# Altium PCB Copy of Controller.PcbDoc (part 1 of 2)
Units mm, origin at the board's own origin, x right, y up, seen from the top; angles counter-clockwise.
Board outline 100 x 80 mm, 2 copper layers (Top Layer, Bottom Layer); 164 components, 143 nets, 702 pads, 520 vias.
Unrouted connection lines stored in the file: 175.
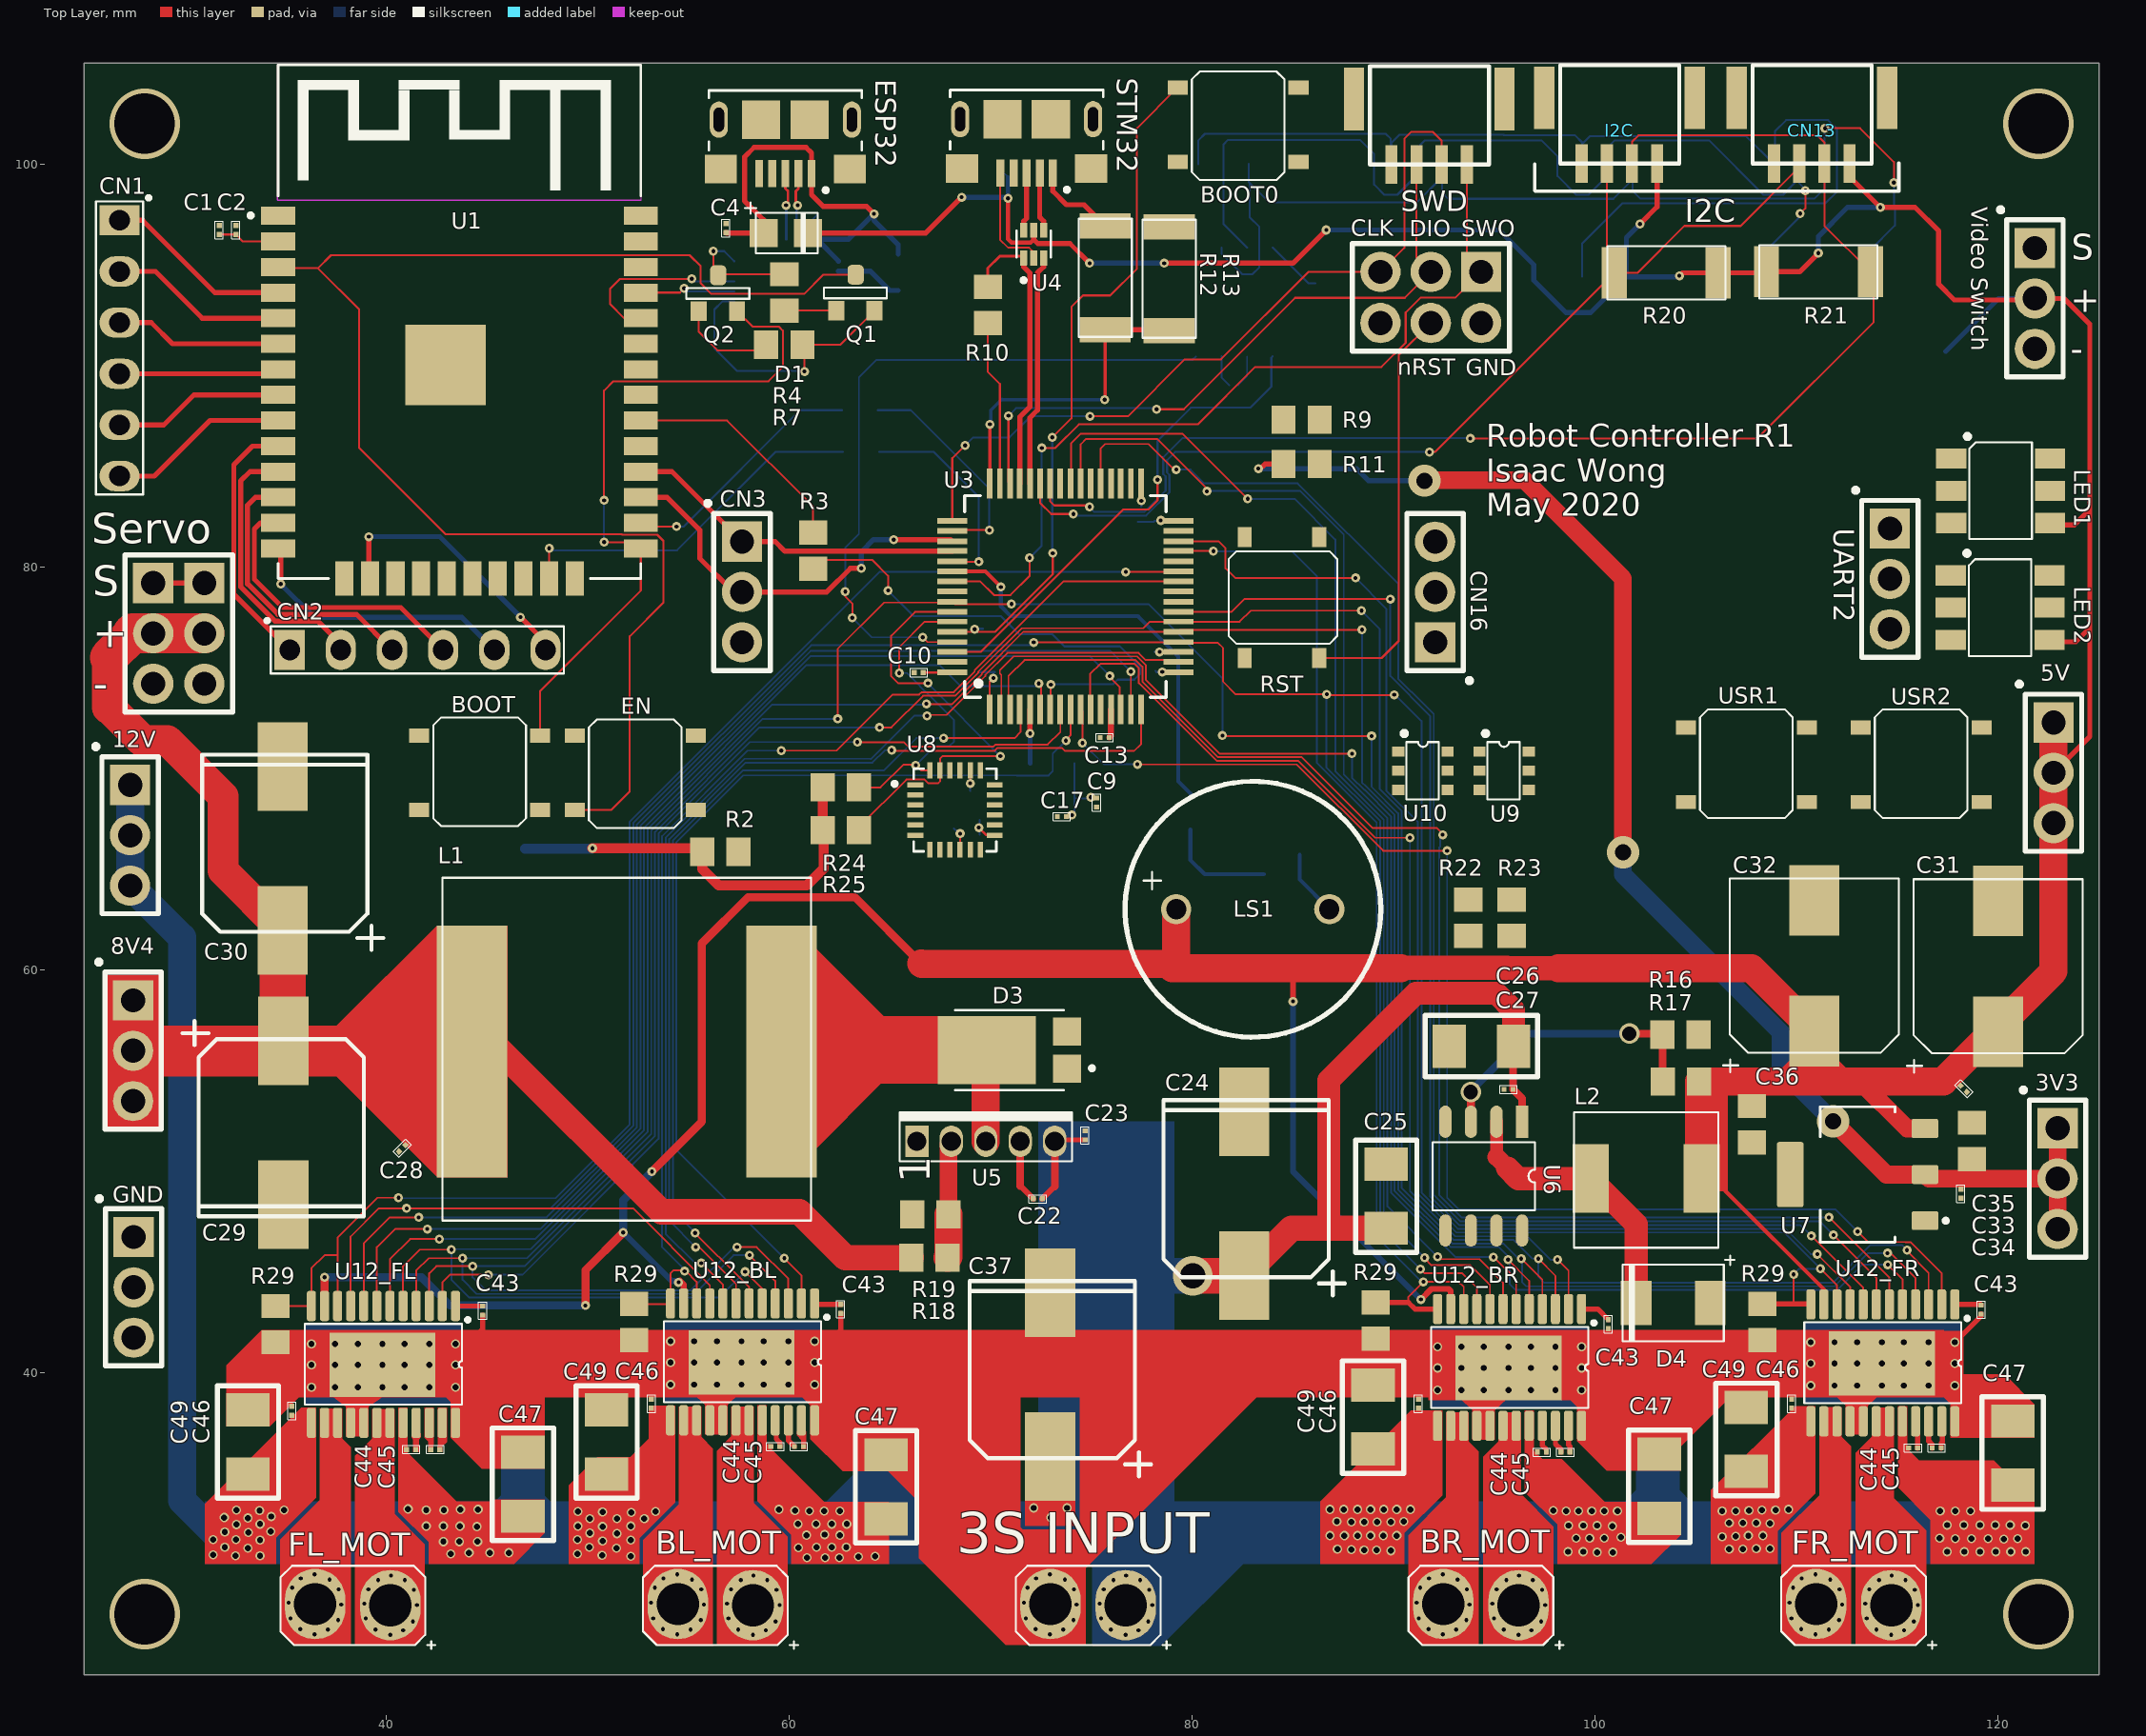
[diagram p0: Top Layer view]
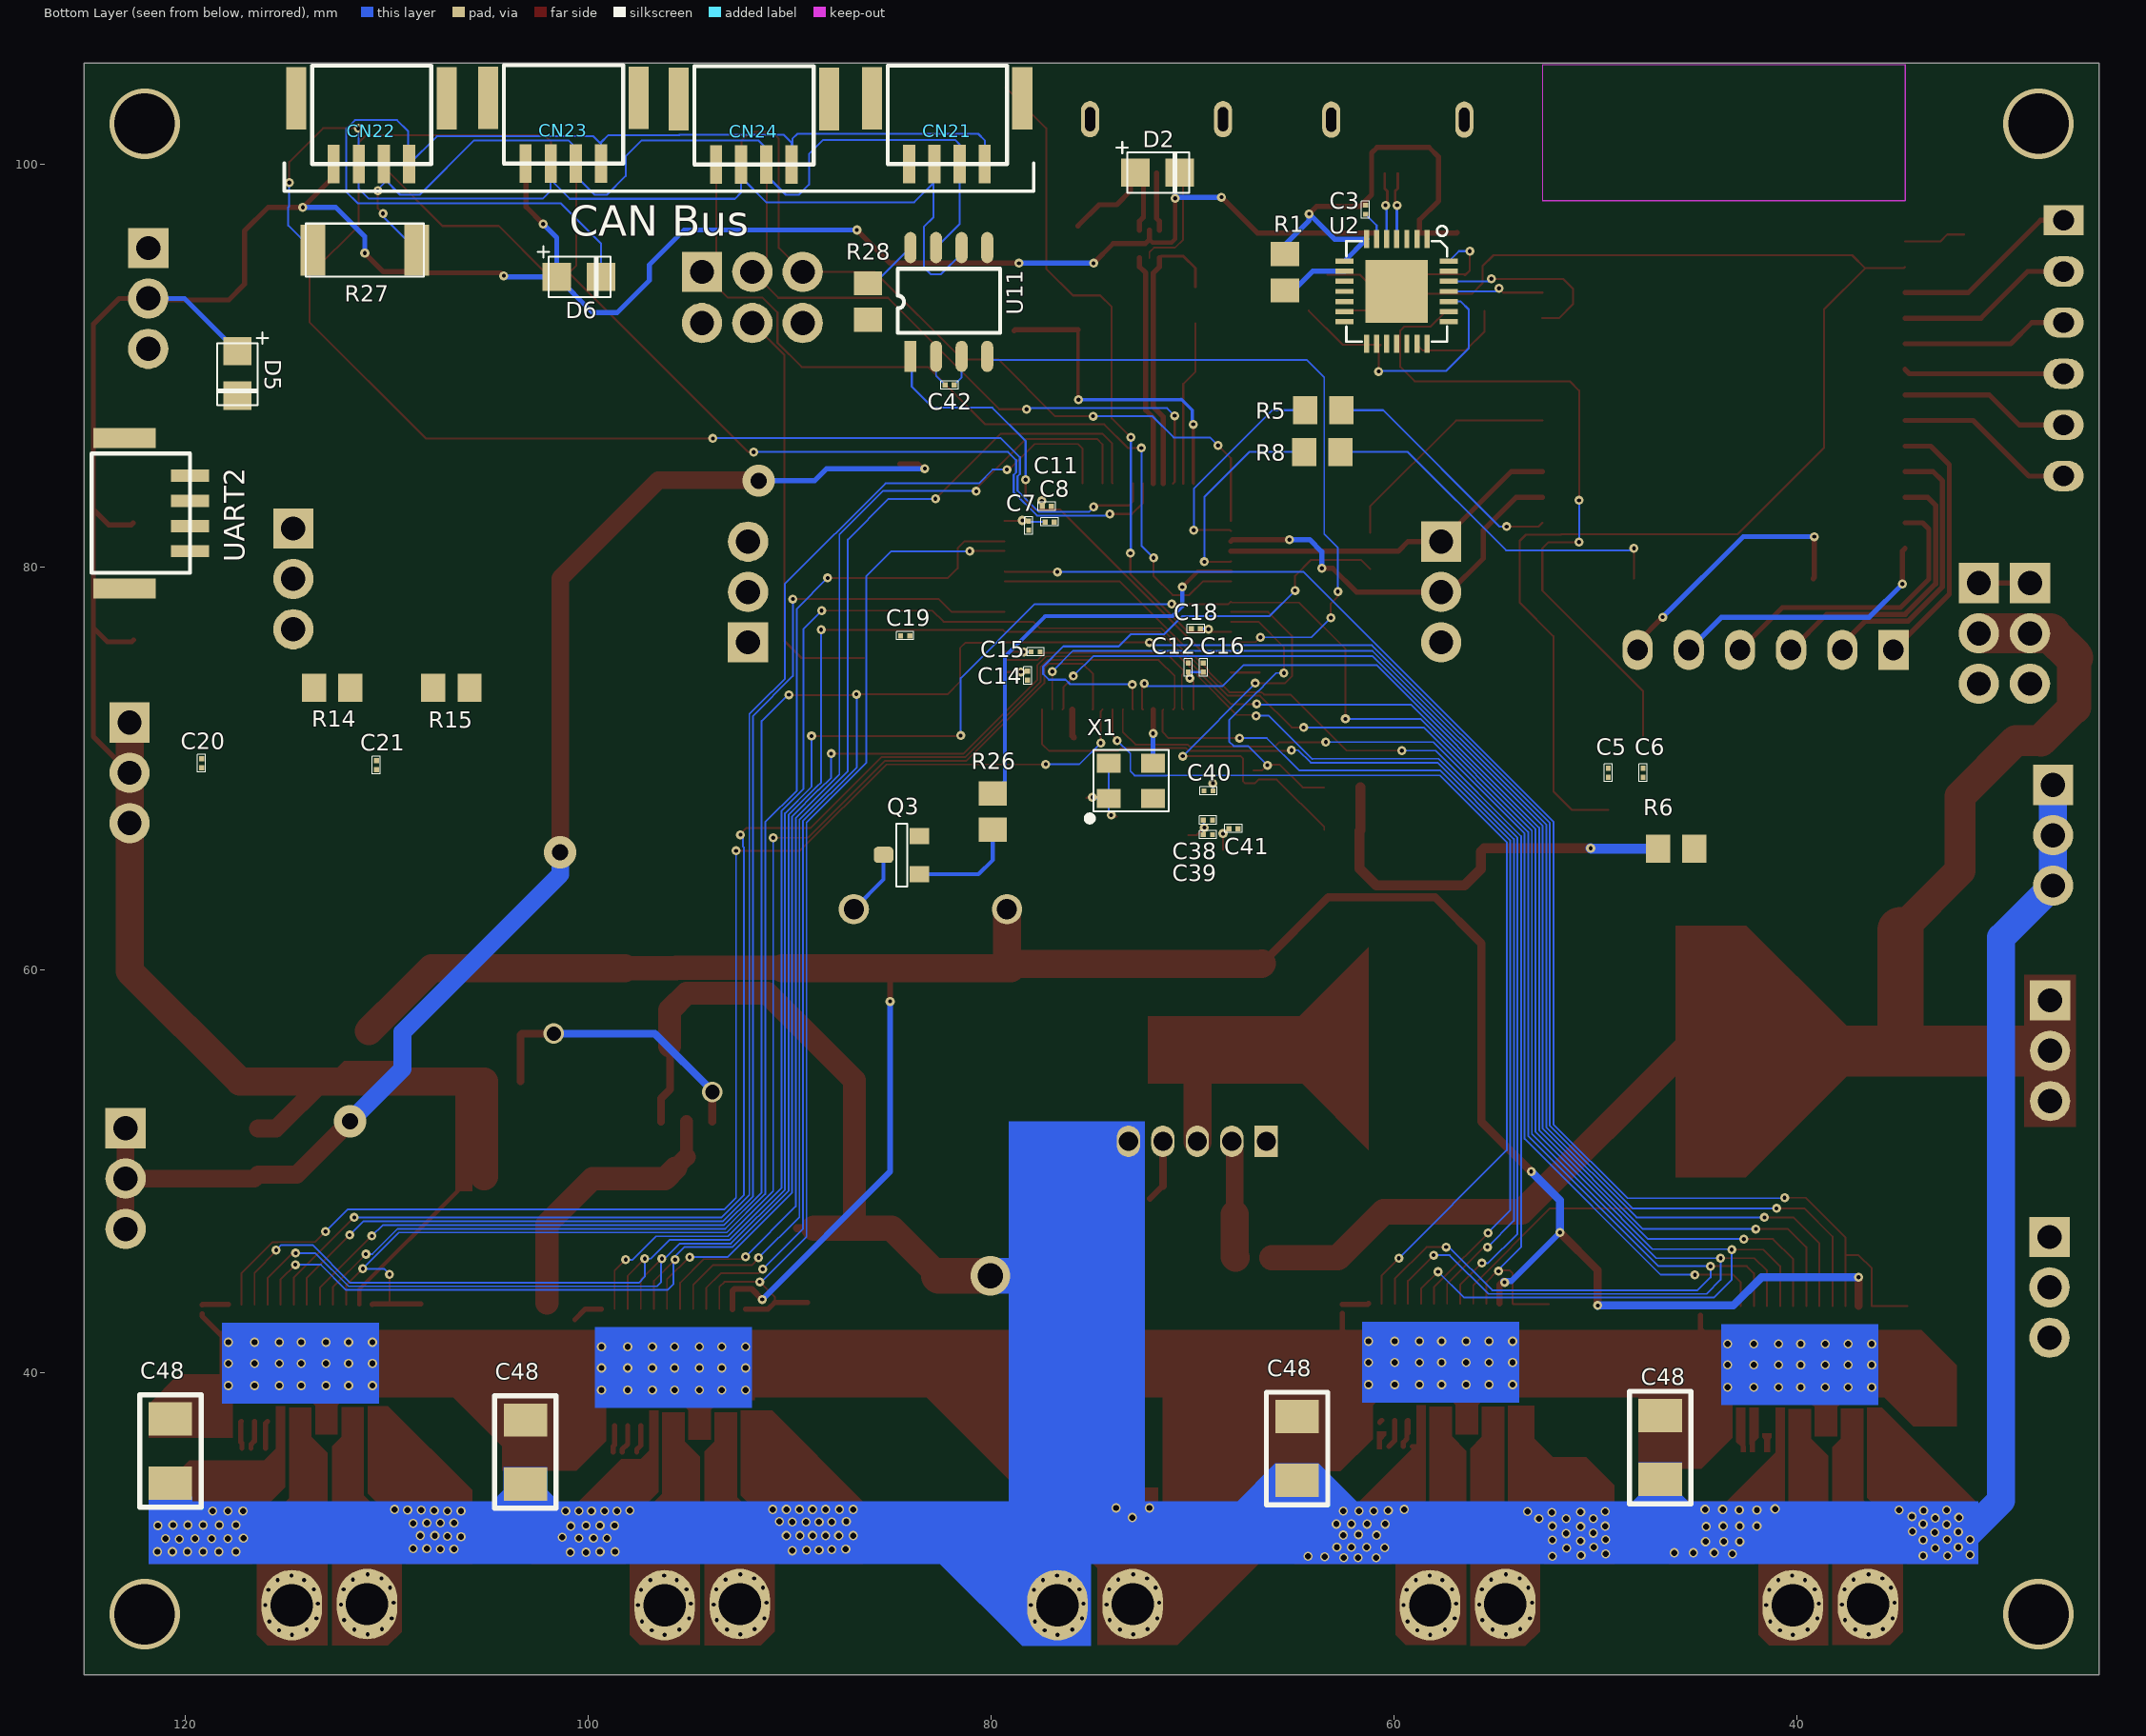
[diagram p1: Bottom Layer view, seen from below]

## Layer stack, top to bottom
Top Solder: solder mask 0.0102, Solder Resist, Dk 3.5
Top Layer: signal copper 0.0356
Dielectric 1: dielectric 0.32, FR-4, Dk 4.8
Bottom Layer: signal copper 0.0356
Bottom Solder: solder mask 0.0102, Solder Resist, Dk 3.5

## Board outline
25,25 125,25 125,105 25,105

## Design rules (kind name [scope] priority, off if disabled: settings)
BoardOutlineClearance [All] p1: gap=0.2 ignorepadtopadclearanceinfootprint=FALSE except(0.4: Arc-SplitBarrior Arc-SplitContinuation Track-SplitBarrior Track-SplitContinuation SMDPad-SplitBarrior SMDPad-SplitContinuation THPad-SplitBarrior THPad-SplitContinuation Via-SplitBarrior Via-SplitContinuation Fill-SplitBarrior Fill-SplitContinuation Poly-SplitBarrior Poly-SplitContinuation Region-SplitBarrior Region-SplitContinuation Text-SplitBarrior Text-SplitContinuation)
Clearance "Clearance Bottom Layer" [OnLayer('Bottom Layer')] p1: gap=0.2 ignorepadtopadclearanceinfootprint=TRUE except(0.089: Arc-Arc Arc-Track Arc-SMDPad Track-Track Track-SMDPad SMDPad-SMDPad; 0.127: Arc-Via Track-Via SMDPad-Via THPad-Via Via-Via; 0.254: Arc-Text Track-Text SMDPad-Text THPad-Text Via-Text Text-Text)
Clearance "Clearance Top Layer" [OnLayer('Top Layer')] p2: gap=0.2 ignorepadtopadclearanceinfootprint=TRUE except(0.089: Arc-Arc Arc-Track Arc-SMDPad Track-Track Track-SMDPad SMDPad-SMDPad; 0.127: Arc-Via Track-Via SMDPad-Via THPad-Via Via-Via; 0.203: Text-Hole; 0.254: Arc-Text Track-Text SMDPad-Text THPad-Text Via-Text Fill-Text Poly-Text Region-Text Text-Text)
Clearance [All] p3: gap=0.2 ignorepadtopadclearanceinfootprint=FALSE except(0.089: Arc-Arc Arc-Track Arc-SMDPad Track-Track Track-SMDPad SMDPad-SMDPad; 0.127: Arc-Via Track-Via SMDPad-Via THPad-Via Via-Via; 0.254: Arc-Text Track-Text SMDPad-Text THPad-Text Via-Text Fill-Text Poly-Text Region-Text Text-Text)
DiffPairsRouting [All] p1: maxlimit=0.254 minlimit=0.254 mostfreqgap=0.254 toplayer_minwidth=0.127 toplayer_maxwidth=0.381 toplayer_prefwidth=0.381 bottomlayer_minwidth=0.127 bottomlayer_maxwidth=0.381 bottomlayer_prefwidth=0.381 maxuncoupledlength=12.7
HoleSize [All] p1: absolutevalues=TRUE maxlimit=6.3 minlimit=0.2 maxpercent=80.000 minpercent=20.000
MinimumAnnularRing [All] p1: minimumring=0.076
MinimumSolderMaskSliver [All] p1: minsoldermaskwidth=0.1
PolygonConnect PolygonConnect_1 [All] p1: thpad.connectstyle=Relief thpad.reliefconductorwidth=0.508 thpad.reliefentries=4 thpad.polygonreliefangle="90 Angle" thpad.airgapwidth=0.254 smdpad.connectstyle=Relief smdpad.reliefconductorwidth=0.508 smdpad.reliefentries=4 smdpad.polygonreliefangle="90 Angle" smdpad.airgapwidth=0.254 via.connectstyle=Direct via.reliefconductorwidth=0.508 via.reliefentries=4 via.polygonreliefangle="90 Angle" via.airgapwidth=0.254
RoutingCorners [All] p1: cornerstyle=Round minsetback=2.54 maxsetback=2.54
RoutingVias [All] p1: holewidth=0.5 width=1 viastyle="Through Hole" minholewidth=0.2 minwidth=0.45 maxholewidth=1 maxwidth=2
SilkToSilkClearance [All] p1: silktosilkclearance=0.1
SilkToSolderMaskClearance [IsPad] p1: minsilkscreentomaskgap=0.1 clearancetoexposedcopper=TRUE
SolderMaskExpansion [All] p1: expansion=0.102
Width [All] p1: maxlimit=2.54 minlimit=0.089 preferedwidth=0.381
24 further rules are at their usual default settings.

## Classes and differential pairs
channel class DRV8843: BL BR FL FR
component class U_Power: "3S INPUT" 3V3 5V 8V4 12V C22 C23 C24 C25 C26 C27 C28 C29 C30 C31 C32 C33 C34 C35 C36 C37 D3 D4 GND L1 L2 R16 R17 R18 R19 U5 U6 U7
component class U_MCU: BOOT BOOT0 C1 C2 C3 C4 C5 C6 C7 C8 C9 C10 C11 C12 C13 C14 C15 C16 C17 C18 C19 C20 C21 CN1 CN2 CN3 D2 EN ESP32 Q1 Q2 R1 R2 R3 R4 R5 R6 R7 R8 R9 R10 R11 R12 R13 R14 R15 RST STM32 SWD U1 U2 U3 U4 USR1 USR2 X1
component class U_LED: LED1 LED2 U9 U10
component class U_IMU: C38 C39 C40 C41 U8
component class U_Drive: BL_MOT BR_MOT FL_MOT FR_MOT
component class U_CAN: C42 CN21 CN22 CN23 CN24 D6 R27 R28 U11
component class FR: C43 C44 C45 C46 C47 C48 C49 R29 U12_FR
component class FL: C44 C45 C46 C47 C48 R29 U12_FL
component class Controller: CN13 CN16 D5 I2C LS1 Q3 R20 R21 R22 R23 R24 R25 R26 UART2 "Video SWITCH"
component class BR: C43 C44 C45 C46 C47 C48 C49 R29 U12_BR
component class BL: C43 C44 C45 C46 C47 C48 C49 R29 U12_BL
differential pair USB: +USB_P -USB_N
differential pair NO_ESD: +NO_ESD_P -NO_ESD_N
differential pair ESP_USB: +ESP_USB_P -ESP_USB_N

## Components (designator, comment, footprint, x,y, rotation, side; value= is the part's Value field where it differs from the comment)
"3S INPUT" "Power In" Power_Leads 75.5,28.5 r180 top locked (schematic designator CN7)
3V3 "3P-2.5mm" 2.5mm-3P 122.95,52.125 r0 top (schematic designator CN11)
5V "3P-2.5mm" 2.5mm-3P 122.75,72.275 r0 top (schematic designator CN10)
8V4 "3P-2.5mm" 2.5mm-3P 27.425,58.475 r0 top (schematic designator CN9)
12V "3P-2.5mm" 2.5mm-3P 27.275,69.175 r0 top (schematic designator CN12)
BL_MOT "BL_MOT" Power_Leads 57,28.5 r180 top locked (schematic designator CN27)
BOOT "SPST Switch" 4.8x4.8-SMD-SWITCH 41.625,71.625 r0 top (schematic designator SW2)
BOOT0 "SPST Switch" 4.8x4.8-SMD-SWITCH 85.275,100.1 r180 top (schematic designator SW3)
BR_MOT "BR_MOT" Power_Leads 95,28.5 r180 top locked (schematic designator CN28)
C1 "ESP32_P1" 0402 31.7,96.725 r270 top value=1uF
C2 "ESP32_P1" 0402 32.525,96.725 r270 top value=100nF
C3 "P6" 0402 61.4,97.725 r270 bottom value=100nF
C4 "P7" 0402 56.85,96.825 r270 top value=100nF
C5 "Cap" 0402 49.35,69.775 r270 bottom value=100nF
C6 "Cap" 0402 47.625,69.775 r90 bottom value=100nF
C7 "Pin 32" 0402 78.125,82.05 r90 bottom value=100nF
C8 "Pin 33" 0402 77.225,83 r0 bottom value=100nF
C9 "XO" 0402 75.25,68.3 r90 top value=100nF
C10 "" 0402 66.425,74.75 r0 top value=1uF
C11 "" 0402 77.075,82.225 r0 bottom value=1uF
C12 "Pin 1" 0402 70.2,75 r270 bottom value=100nF
C13 "Pin 13" 0402 75.65,71.525 r0 top value=100nF
C14 "Pin 17" 0402 78.175,74.6 r90 bottom value=100nF
C15 "Pin 19" 0402 77.775,75.775 r0 bottom value=100nF
C16 "Pin 64" 0402 69.45,75 r270 bottom value=100nF
C17 "XO" 0402 73.525,67.6 r0 top value=10nF
C18 "Cap" 0402 69.825,76.925 r0 bottom value=100nF
C19 "Cap" 0402 84.25,76.575 r0 bottom value=100nF
C20 "Cap" 0402 119.175,70.25 r90 bottom value=100nF
C21 "Cap" 0402 110.5,70.15 r90 bottom value=100nF
C22 "Cap" 0402 72.325,48.625 r0 top value=1uF
C23 "Cap" 0402 74.675,51.775 r270 top value=1uF
C24 "470uF" 10x12mm-Electrolytic 82.575,49.125 r270 top
C25 "Cap" 1206 89.625,48.75 r270 top value=47uF
C26 "Cap" 1206 94.35,56.2 r0 top value=47uF
C27 "Cap" 0402 95.7,54.05 r0 top value=100nF
C28 "Cap" 0402 40.784,51.134 r45 top value=1uF
C29 "470uF" 10x12mm-Electrolytic 34.875,52.15 r90 top
C30 "470uF" 10x12mm-Electrolytic 34.85,66.275 r270 top
C31 "100uF" "8x10.2 Cap" 120,60.175 r90 top
C32 "100uF" "8x10.2 Cap" 110.875,60.2 r90 top
C33 "Cap" "0805 - duplicate" 118.7,51.5 r270 top value=4.7uF
C34 "Cap" 0402 118.15,48.875 r90 top value=100nF
C35 "Cap" 0402 118.291,54.084 r135 top value=100nF
C36 "Cap" "0805 - duplicate" 107.775,52.325 r90 top value=4.7uF
C37 "470uF" 10x12mm-Electrolytic 72.95,40.143 r270 top
C38 "Cap" 0402 69.225,67.425 r0 bottom value=1uF
C39 "Cap" 0402 69.225,66.7 r0 bottom value=100nF
C40 "Cap" 0402 69.2,68.875 r180 bottom value=2.2nF
C41 "Cap" 0402 67.95,67 r0 bottom value=100nF
C42 "Cap" 0402 82.05,89.025 r180 bottom value=100nF
C43 "Cap" 0402 119.15,43.125 r270 top value=1uF
C43 "Cap" 0402 44.775,43.075 r270 top value=1uF
C43 "Cap" 0402 100.65,42.4 r270 top value=1uF
C43 "Cap" 0402 62.55,43.15 r270 top value=1uF
C44 "Cap" 0402 115.775,36.25 r180 top value=1uF
C44 "Cap" 0402 41.225,36.175 r180 top value=1uF
C44 "Cap" 0402 97.35,36.05 r180 top locked value=1uF
C44 "Cap" 0402 59.3,36.325 r180 top value=1uF
C45 "Cap" 0402 116.95,36.25 r180 top value=47nF
C45 "Cap" 0402 42.425,36.175 r180 top value=47nF
C45 "Cap" 0402 98.525,36.05 r180 top locked value=47nF
C45 "Cap" 0402 60.475,36.325 r180 top value=47nF
C46 "Cap" 0402 109.75,38.45 r270 top value=100nF
C46 "Cap" 0402 35.3,38.1 r270 top value=100nF
C46 "Cap" 0402 91.225,38.45 r270 top value=100nF
C46 "Cap" 0402 53.15,38.45 r270 top value=100nF
C47 "Cap" 1206 120.725,36 r270 top value=47uF
C47 "Cap" 1206 46.775,34.45 r270 top locked value=47uF
C47 "Cap" 1206 103.175,34.35 r270 top value=47uF
C47 "Cap" 1206 64.8,34.325 r270 top locked value=47uF
C48 "Cap" 1206 120.725,36.1 r270 bottom value=47uF
C48 "Cap" 1206 46.775,36.275 r270 bottom value=47uF
C48 "Cap" 1206 103.1,36.05 r270 bottom value=47uF
C48 "Cap" 1206 64.8,36.225 r270 bottom locked value=47uF
C49 "Cap" 1206 107.5,36.675 r270 top value=47uF
C49 "Cap" 1206 33.125,36.55 r270 top value=47uF
C49 "Cap" 1206 88.975,37.788 r270 top value=47uF
C49 "Cap" 1206 50.925,36.55 r270 top value=47uF
CN1 "6P-2.5mm" 6-Pin-Header 26.75,97.205 r0 top
CN2 "6P-2.5mm" 6-Pin-Header 35.195,75.875 r90 top
CN3 "3P-2.5mm" 2.5mm-3P 57.65,81.25 r0 top
CN13 "JST_GH-4P" JST_GH-4P 108.875,100.025 r90 top
CN16 "3P-2.5mm" 2.5mm-3P 92.05,76.25 r180 top
CN21 "JST_GH-4P" JST_GH-4P 84.05,100 r90 bottom
CN22 "JST_GH-4P" JST_GH-4P 112.625,100 r90 bottom
CN23 "JST_GH-4P" JST_GH-4P 103.1,100.025 r90 bottom
CN24 "JST_GH-4P" JST_GH-4P 93.646,99.974 r90 bottom
D1 "SS12F" SMAF_DIODE 59.825,96.575 r0 top
D2 "SS12F" SMAF_DIODE 71.725,99.575 r180 bottom
D3 "Diode" PowerDi5 70.919,56.005 r90 top
D4 "SS24" DO-214AA 103.875,43.45 r0 top
D5 "SS12F" SMAF_DIODE 117.4,89.6 r270 bottom
D6 "SS12F" SMAF_DIODE 100.45,94.4 r180 bottom
EN "SPST Switch" 4.8x4.8-SMD-SWITCH 55.35,67.925 r180 top (schematic designator SW1)
ESP32 "10118193-0001LF" FCI_10118193-0001LF 59.8,102.2 r180 top locked (schematic designator J1)
FL_MOT "FL_MOT" Power_Leads 39,28.5 r180 top locked (schematic designator CN25)
FR_MOT "FR_MOT" Power_Leads 113.5,28.5 r180 top locked (schematic designator CN26)
GND "3P-2.5mm" 2.5mm-3P 27.45,46.725 r0 top (schematic designator CN8)
I2C "JST_GH-4P" JST_GH-4P 99.325,100.025 r90 top (schematic designator CN17)
L1 "47uH 8A" 18x16-9-Inductor 51.925,55.925 r180 top locked
L2 "22uH" 71x66-Inductor 102.525,49.625 r0 top
LED1 "APA102C" 5x5_WS2812 117.675,85.375 r0 top
LED2 "APA102C" 5x5_WS2812 117.65,79.575 r0 top
LS1 "Buzzer" 12-dia-buzzer 79.2,63 r0 top
Q1 "S8050" SOT23-FET 62.325,92.725 r90 top
Q2 "S8050" SOT23-FET 55.5,92.7 r90 top
Q3 "S8050" SOT23-FET 83.547,64.735 r0 bottom
R1 "10k" "0805 - duplicate" 65.4,94.625 r270 bottom
R2 "10k" "0805 - duplicate" 56.575,65.85 r0 top
R3 "0R" "0805 - duplicate" 61.175,80.8 r270 top
R4 "10k" "0805 - duplicate" 59.75,93.625 r270 top
R5 "1k" "0805 - duplicate" 63.5,87.775 r0 bottom
R6 "10k" "0805 - duplicate" 45.975,66 r180 bottom
R7 "10k" "0805 - duplicate" 59.75,91.025 r180 top
R8 "1k" "0805 - duplicate" 63.55,85.7 r0 bottom
R9 "10k" "0805 - duplicate" 85.425,87.3 r0 top
R10 "1.5k" "0805 - duplicate" 69.85,93 r90 top
R11 "10k" "0805 - duplicate" 85.425,85.1 r0 top
R12 "10k" 2010_SMD_Resistor 75.675,94.35 r90 top
R13 "15k" 2010_SMD_Resistor 78.85,94.3 r270 top
R14 "10k" "0805 - duplicate" 112.7,74 r0 bottom
R15 "10k" "0805 - duplicate" 106.775,74 r180 bottom
R16 "3.3k" "0805 - duplicate" 104.225,56.775 r0 top
R17 "10k" "0805 - duplicate" 104.25,54.45 r0 top
R18 "10k" "0805 - duplicate" 66.95,45.7 r180 top
R19 "1.74k" "0805 - duplicate" 67,47.85 r0 top
R20 "2k" 2010_SMD_Resistor 103.525,94.6 r0 top
R21 "2k" 2010_SMD_Resistor 111.079,94.65 r180 top
R22 "20k" "0805 - duplicate" 93.7,62.575 r270 top
R23 "4k" "0805 - duplicate" 95.85,62.575 r270 top
R24 "2k" "0805 - duplicate" 62.55,69.05 r180 top
R25 "2k" "0805 - duplicate" 62.55,66.925 r180 top
R26 "1k" "0805 - duplicate" 79.9,67.85 r90 bottom
R27 "120" 2010_SMD_Resistor 111.075,95.725 r180 bottom
R28 "100" "0805 - duplicate" 86.1,93.175 r90 bottom
R29 "150R" "0805 - duplicate" 108.3,42.5 r90 top
R29 "150R" "0805 - duplicate" 34.5,42.4 r90 top
R29 "150R" "0805 - duplicate" 89.1,42.575 r90 top
R29 "150R" "0805 - duplicate" 52.3,42.5 r90 top
RST "SPST Switch" 4.8x4.8-SMD-SWITCH 86.3,81.475 r270 top (schematic designator SW4)
STM32 "10118193-0001LF" FCI_10118193-0001LF 71.775,102.225 r180 top locked (schematic designator J2)
SWD "JST_GH-4P" JST_GH-4P 89.879,99.974 r90 top (schematic designator CN4)
U1 "ESP-WROOM-32" ESP-WROOM-32 43.625,89.17 r0 top
U2 "CP2102-GMR" QFN28G_0.5-5X5MM 59.85,93.675 r270 bottom locked
U3 "STM32F373RCTx" LQFP64 73.7,78.525 r90 top locked
U4 "USBLC6-2P6" SOT50P160X60-6N 72.125,96.025 r90 top locked
U5 "XL4016" TO220-5L 66.33,51.475 r90 top
U6 "XL1509-ADJ" SOP8-MT3420 96.37,52.45 r270 top
U7 "AMS1117-3.3" SOT229P700X180-4N 113.025,49.825 r90 top
U8 "MPU-6050" QFN50P400X400X95-24N 68.225,67.925 r0 top locked
U9 "PI4ULS5V201" SOT23-PI4ULS5V201 94.25,70.825 r0 top
U10 "PI4ULS5V201" SOT23-PI4ULS5V201 90.225,70.825 r0 top
U11 "SN65HVD230" SOIC8-TI_CAN 83.99,90.45 r90 bottom locked
U12_BL "DRV8873S" HTSSOP24 61.25,43.425 r270 top locked (schematic designator U12)
U12_BR "DRV8873S" HTSSOP24 99.325,43.15 r270 top locked (schematic designator U12)
U12_FL "DRV8873S" HTSSOP24 43.425,43.3 r270 top locked (schematic designator U12)
U12_FR "DRV8873S" HTSSOP24 117.85,43.375 r270 top locked (schematic designator U12)
UART2 "3P-2.5mm" 2.5mm-3P 114.625,81.9 r0 top (schematic designator CN20)
UART2 "JST_GH-4P" JST_GH-4P 119.75,80.775 r0 bottom (schematic designator CN19)
USR1 "USR_BTN1" 4.8x4.8-SMD-SWITCH 104.5,72.025 r0 top (schematic designator SW6)
USR2 "USR_BTN2" 4.8x4.8-SMD-SWITCH 113.175,72.025 r0 top (schematic designator SW5)
"Video Switch" "3P-2.5mm" 2.5mm-3P 121.825,95.825 r0 top locked (schematic designator CN18)
X1 "8MHz 3225 SMD Oscillator" "3.2x2.5 SMD" 74.15,70.25 r180 bottom

## Footprints (in the part's own frame and the unit in brackets; to place one, negate y for a bottom-side part, rotate by r counter-clockwise, add the part's x,y. Pads: shape width x height; smd on the part's side, far side on the other; paste and mask are expansions set on the pad)
2.5mm-3P [mm]
  rect 2x2 hole 1.2: 1(0,0)
  round 2 hole 1.2: 2(0,-2.5) 3(0,-5)
  silkscreen extent -1.8,-6.4 1.4,2
"3.2x2.5 SMD" [mm]
  rect 1.2x0.95 smd: 1(0,-1.75) 2(2.2,-1.75) 3(2.2,0) 4(0,0)
  silkscreen extent -1.11,-2.91 2.97,0.66
4.8x4.8-SMD-SWITCH [mm]
  rect 1x0.7 smd: 1(0,0) 2(6,0) 3(0,-3.7) 4(6,-3.7)
  silkscreen extent 0.7,-4.5 5.3,0.9
5x5_WS2812 [mm]
  rect 1.5x1 smd: 1(0,0) 2(0,-1.6) 3(0,-3.2) 4(4.9,-3.2) 5(4.9,-1.6) 6(4.9,0)
  silkscreen extent 0.7,-4 4,1.2
6-Pin-Header [mm]
  rect 2x1.5 hole 1.02: 1(0,0)
  oval 2x1.5 hole 1.02: 2(0,-2.54) 3(0,-5.08) 4(0,-7.62) 5(0,-10.16) 6(0,-12.7)
  silkscreen extent -1.17,-13.61 1.5,1.17
"8x10.2 Cap" [mm]
  rect 3.5x2.5 smd: 1(-3.25,0) 2(3.25,0)
  silkscreen extent -5.28,-4.19 4.32,4.52
10x12mm-Electrolytic [mm]
  rect 4.4x2.5 smd: 1(4.318,0) 2(-3.81,0)
  silkscreen extent -4.4,-4 5.3,5
12-dia-buzzer [mm]
  round 1.5 hole 1: A(0,0) K(7.6,0)
  silkscreen extent -2.54,-6.35 10.16,6.35
18x16-9-Inductor [mm]
  rect 3.5x12.5 smd: 1(-7.675,0) 2(7.675,0)
  silkscreen extent -9.14,-8.64 9.14,8.38
71x66-Inductor [mm]
  rect 1.8x3.4 smd: 1(-2.75,0) 2(2.75,0)
  silkscreen extent -3.58,-3.43 3.58,3.3
0402 [mm]
  rect 0.25x0.25 smd mask+0.05: 1(-0.225,0) 2(0.225,0)
  silkscreen extent -0.43,-0.2 0.43,0.2
"0805 - duplicate" [mm] "Chip Resistor, Body 2.0x1.2mm, IPC Medium Density"
  rect 1.2x1.4 smd: 1(-0.9,0) 2(0.9,0)
  body extent -1.07,-0.7 1.07,0.7, height 0.7
1206 [mil]
  rect 65x85 smd: 1(-62.5,0) 2(62.5,0)
  silkscreen extent -110,-60 110,60
2010_SMD_Resistor [mm]
  rect 1.245x2.54 smd: 1(-2.578,0) 2(2.579,0)
  silkscreen extent -2.93,-1.32 2.93,1.32
DO-214AA [mm]
  rect 1.52x2.18 smd: A(1.84,0) K(-1.839,0)
  silkscreen extent -2.51,-1.91 3.05,2.36
ESP-WROOM-32 [mm]
  rect 1.7x0.9 smd: 1(-9,8.255) 2(-9,6.985) 3(-9,5.715) 4(-9,4.445) 5(-9,3.175) 6(-9,1.905) 7(-9,0.635) 8(-9,-0.635) 9(-9,-1.905) 10(-9,-3.175) 11(-9,-4.445) 12(-9,-5.715) 13(-9,-6.985) 14(-9,-8.255) 25(9,-8.255) 26(9,-6.985) 27(9,-5.715) 28(9,-4.445) 29(9,-3.175) 30(9,-1.905) 31(9,-0.635) 32(9,0.635) 33(9,1.905) 34(9,3.175) 35(9,4.445) 36(9,5.715) 37(9,6.985) 38(9,8.255)
  rect 4x4 smd: 1(-0.7,0.845)
  rect 0.9x1.7 smd: 15(-5.715,-9.755) 16(-4.445,-9.755) 17(-3.175,-9.755) 18(-1.905,-9.755) 19(-0.635,-9.755) 20(0.635,-9.755) 21(1.905,-9.755) 22(3.175,-9.755) 23(4.445,-9.755) 24(5.715,-9.755)
  Keep-Out Layer region: -9.024,15.75 9,15.75 9,9.024 -9.024,9.024
  Keep-Out Layer region: -9.012,15.75 9,15.75 9,9.012 -9.012,9.012
  Keep-Out Layer region: -9.026,15.75 9,15.75 9,9.026 -9.026,9.026
  Keep-Out Layer region: -9.024,15.75 9,15.75 9,9.024 -9.024,9.024
  Keep-Out Layer region: -9.012,15.75 9,15.75 9,9.012 -9.012,9.012
  Keep-Out Layer region: -9.026,15.75 9,15.75 9,9.026 -9.026,9.026
  Keep-Out Layer region: -9.024,15.75 9,15.75 9,9.024 -9.024,9.024
  Keep-Out Layer region: -9.012,15.75 9,15.75 9,9.012 -9.012,9.012
  Keep-Out Layer region: -9.026,15.75 9,15.75 9,9.026 -9.026,9.026
  silkscreen extent -10.46,-9.75 9,15.75
FCI_10118193-0001LF [mm]
  rect 0.4x1.35 smd: 1(-1.3,2.675) 2(-0.65,2.675) 3(0,2.675) 4(0.65,2.675) 5(1.3,2.675)
  oval 0.9x1.8 hole 0.5 slot 1.2 at 90 deg: S(-3.3,0) S(3.3,0)
  rect 1.6x1.4 smd: S(-3.2,2.45) S(3.2,2.45)
  rect 1.9x1.9 smd: S(-1.2,0) S(1.2,0)
  silkscreen extent -3.8,-1.45 3.8,3.6
HTSSOP24 [mm]
  rrect50% 1.5x0.45 smd mask+0.05: 1(0,0) 2(0,-0.65) 3(0,-1.3) 4(0,-1.95) 5(0,-2.6) 6(0,-3.25) 7(0,-3.9) 8(0,-4.55) 9(0,-5.2) 10(0,-5.85) 11(0,-6.5) 12(0,-7.15) 13(5.8,-7.15) 14(5.8,-6.5) 15(5.8,-5.85) 16(5.8,-5.2) 17(5.8,-4.55) 18(5.8,-3.9) 19(5.8,-3.25) 20(5.8,-2.6) 21(5.8,-1.95) 22(5.8,-1.3) 23(5.8,-0.65) 24(5.8,0)
  rect 3.2x5.26 smd: THERM(2.925,-3.625)
  Top Layer region: 1.325,-6.225 4.525,-6.225 4.525,-7.6 1.325,-7.6
  Top Layer region: 1.325,-6.2
  Top Layer region: 1.325,-1 1.325,0.425 4.525,0.425 4.525,-1
  silkscreen extent 0.63,-7.48 4.9,0.67
JST_GH-4P [mm]
  rect 1.9x0.6 smd: 1(0,-3.75) 2(0,-2.5) 3(0,-1.25) 4(0,0)
  rect 3.1x1 smd: 5(3.251,-5.613) 5(3.251,1.854)
  silkscreen extent 0,-4.85 4.88,1.07
LQFP64 [mil]
  rect 58x11 smd: 1(-221,148) 2(-221,128) 3(-221,108) 4(-221,89) 5(-221,69) 6(-221,49) 7(-221,30) 8(-221,10) 9(-221,-10) 10(-221,-30) 11(-221,-49) 12(-221,-69) 13(-221,-89) 14(-221,-108) 15(-221,-128) 16(-221,-148) 33(221,-148) 34(221,-128) 35(221,-108) 36(221,-89) 37(221,-69) 38(221,-49) 39(221,-30) 40(221,-10) 41(221,10) 42(221,30) 43(221,49) 44(221,69) 45(221,89) 46(221,108) 47(221,128) 48(221,148)
  rect 11x58 smd: 17(-148,-221) 18(-128,-221) 19(-108,-221) 20(-89,-221) 21(-69,-221) 22(-49,-221) 23(-30,-221) 24(-10,-221) 25(10,-221) 26(30,-221) 27(49,-221) 28(69,-221) 29(89,-221) 30(108,-221) 31(128,-221) 32(148,-221) 49(148,221) 50(128,221) 51(108,221) 52(89,221) 53(69,221) 54(49,221) 55(30,221) 56(10,221) 57(-10,221) 58(-30,221) 59(-49,221) 60(-69,221) 61(-89,221) 62(-108,221) 63(-128,221) 64(-148,221)
  silkscreen extent -197,-197 197,197
Power_Leads [mm]
  oval 3x3.5 hole 2.1: A(-1.194,0.051) K(2.54,0)
  silkscreen extent -3.43,-1.91 4.27,2.21
PowerDi5 [mm]
  rect 1.39x1.4 smd: 1(-0.92,-2.856) 2(0.92,-2.856)
  rect 3.36x4.86 smd: 3(0,1.126)
  silkscreen extent -1.99,-4.2 1.99,2.69
QFN28G_0.5-5X5MM [mm]
  rect 0.9x0.254 smd: 1(-2.59,1.5) 2(-2.59,1) 3(-2.59,0.5) 4(-2.59,0) 5(-2.59,-0.5) 6(-2.59,-1) 7(-2.59,-1.5) 15(2.59,-1.5) 16(2.59,-1) 17(2.59,-0.5) 18(2.59,0) 19(2.59,0.5) 20(2.59,1) 21(2.59,1.5)
  rect 0.254x0.9 smd: 8(-1.5,-2.59) 9(-1,-2.59) 10(-0.5,-2.59) 11(0,-2.59) 12(0.5,-2.59) 13(1,-2.59) 14(1.5,-2.59) 22(1.5,2.59) 23(1,2.59) 24(0.5,2.59) 25(0,2.59) 26(-0.5,2.59) 27(-1,2.59) 28(-1.5,2.59)
  rect 3.1x3.1 smd paste-3: 29(0,0)
  silkscreen extent -3.25,-2.5 2.5,2.5
QFN50P400X400X95-24N [mm]
  rect 0.79x0.26 smd mask+0.089: 1(-1.97,1.25) 2(-1.97,0.75) 3(-1.97,0.25) 4(-1.97,-0.25) 5(-1.97,-0.75) 6(-1.97,-1.25) 13(1.97,-1.25) 14(1.97,-0.75) 15(1.97,-0.25) 16(1.97,0.25) 17(1.97,0.75) 18(1.97,1.25)
  rect 0.26x0.79 smd mask+0.089: 7(-1.25,-1.97) 8(-0.75,-1.97) 9(-0.25,-1.97) 10(0.25,-1.97) 11(0.75,-1.97) 12(1.25,-1.97) 19(1.25,1.97) 20(0.75,1.97) 21(0.25,1.97) 22(-0.25,1.97) 23(-0.75,1.97) 24(-1.25,1.97)
  silkscreen extent -3.1,-2.05 2.05,2.05
SMAF_DIODE [mm]
  rect 1.4x1.4 smd: A(-1.1,0) K(1.1,0)
  silkscreen extent -2.03,-1 1.57,1.52
SOIC8-TI_CAN [mm]
  rect 1.55x0.6 smd: 1(0,0)
  oval 1.55x0.6 smd: 2(0,-1.27) 3(0,-2.54) 4(0,-3.81) 5(5.4,-3.81) 6(5.4,-2.54) 7(5.4,-1.27) 8(5.4,0)
  silkscreen extent 1.17,-4.44 4.34,0.64
SOP8-MT3420 [mm]
  rect 1.6x0.61 smd: 1(0,0)
  oval 1.6x0.61 smd: 2(0,-1.27) 3(0,-2.54) 4(0,-3.81) 5(5.4,-3.81) 6(5.4,-2.54) 7(5.4,-1.27) 8(5.4,0)
  silkscreen extent 1.02,-4.44 4.39,0.64
SOT23-FET [mil]
  rect 38.27x31.57 smd: 1(0,0) 2(0,-74.8)
  rrect50% 38.27x31.57 smd: 3(70,-38)
  silkscreen extent 24,-99 45,24
SOT23-PI4ULS5V201 [mm]
  rect 0.6x0.5 smd: 1(0,0) 2(0,-0.95) 3(0,-1.9) 4(2.45,-1.9) 5(2.45,-0.95) 6(2.45,0)
  silkscreen extent 0.2,-2.38 2,1
SOT50P160X60-6N [mm]
  rrect8% 0.75x0.35 smd: 1(-0.69,0.5) 2(-0.69,0) 3(-0.69,-0.5) 4(0.69,-0.5) 5(0.69,0) 6(0.69,0.5)
  silkscreen extent -1.9,-0.85 0.65,0.85
SOT229P700X180-4N [mm]
  rrect15% 0.93x1.31 smd: 1(-2.29,-3.345) 2(0,-3.345) 3(2.29,-3.345)
  rrect15% 3.24x1.31 smd: 4(0,3.345)
  silkscreen extent -3.36,-4.47 3.36,1.86
TO220-5L [mm]
  rect 1.56x1.15 hole 0.95: 1(0,0)
  oval 1.56x1.15 hole 0.95: 2(0,-1.71) 3(0,-3.42) 4(0,-5.13) 5(0,-6.84)
  silkscreen extent -0.99,-7.7 1.45,0.85

## Part data
"3S INPUT" BL_MOT BR_MOT FL_MOT FR_MOT: library part JST_Leads_In
C1 C2 C3 C4 C7 C8 C9 C10 C11 C12 C13 C14 C15 C16 C17: library part Cap, LatestRevisionDate=17-Jul-2002, LatestRevisionNote="Re-released for DXP Platform.", PackageDescription="Radial Cap, Thru-Hole; 2 Leads; 0.3 in Pin Spacing", PackageReference=RAD-0.3, Published=8-Jun-2000, Publisher="Altium Limited"
C24 C29 C30 C31 C32 C37: library part "Polarised Capacitor"
D4: "2A Schottky Diode"
ESP32 STM32: "USB - micro B USB 2.0 Receptacle Connector 5 Position Surface Mount, Right Angle; Through Hole", Package=None, Availability=Unavailable, MF="Amphenol ICC", MP=10118193-0001LF, Price=None, SnapEDA_Link=https://www.snapeda.com/parts/10118193-0001LF/Amphenol%20FCI/view-part/2758989/?ref=snap
L1: library part "SMD Inductor 18x16.9", "TMPC1707"
L2: library part "22uH Inductor, 7.1*6.6"
Q1 Q2 Q3: Package="TO-18-3 NJS", Digi-Key_Part_Number=1086-15156-ND, Digi-Key_Purchase_URL=https://www.digikey.com.mx/product-detail/en/microsemi-corporation/JANS2N2222A/1086-15156-ND/4384334?utm_source=snapeda&utm_medium=aggregator&utm_campaign=symbol, MF="MICROSS/On Semiconductor", MP=2N2222, SnapEDA_Link=https://www.snapeda.com/parts/2N2222/MICROSS/On%20Semiconductor/view-part/561967/?ref=snap
R1 R2 R3 R4 R5 R6 R7 R8 R9 R10 R11 R12 R13 R14 R15 R16 R17 R18 R19 R20 R21 R22 R23 R24 R25 R26 R27 R28 R29 R29 R29 R29: library part Resistor
U1: "WiFi 802.11b/g/n/d/e/i Transceiver Module 2.4GHz Surface Mount", Package="Module Olimex LTD", Availability=Unavailable, MF="Olimex LTD", MP=ESP-WROOM-32, Price=None, SnapEDA_Link=https://www.snapeda.com/parts/ESP-WROOM-32/Olimex%20LTD/view-part/2311927/?ref=snap
U4: "17V Clamp 5A _8/20µs_ Ipp Tvs Diode Surface Mount SOT-666", Package="SOT-563 STMicroelectronics", Availability=Unavailable, MF=STMicroelectronics, MP=USBLC6-2P6, Price=None, SnapEDA_Link=https://www.snapeda.com/parts/USBLC6-2P6/STMicroelectronics/view-part/106846/?ref=snap
U5: "8A Buck COnverter"
U6: library part XL1509-5
U7: "Sot223/Pkg 1-Amp 3.3-Volt Low Drop Out Voltage Regulatator", Package=None, Availability=Unavailable, MF="Advanced Monolithic Systems", MP=AMS1117-3.3, Price=None, SnapEDA_Link=https://www.snapeda.com/parts/AMS1117-3.3/Advanced%20Monolithic%20Systems/view-part/53450/?ref=snap
U8: "Accelerometer, Gyroscope, 6 Axis Sensor I²C Output", Package="VFQFN-24 TDK InvenSense", Availability=Unavailable, MF="TDK InvenSense", MP=MPU-6050, Price=None, SnapEDA_Link=https://www.snapeda.com/parts/MPU-6050/TDK%20InvenSense/view-part/4503180/?ref=snap
U9 U10: "Level Translator"
U11: "CAN Transceiver"
USR1 USR2: library part "SPST Switch"
C5 C6 C18 C19 C20 C21 C22 C23 C25 C26 C27 C28 C33 C34 C35 C36 C38 C39 C40 C41 C42 C43 C43 C43 C43 C44 C44 C44 C44 C45 C45 C45 C45 C46 C46 C46 C46 C47 C47 C47 C47 C48 C48 C48 C48 C49 C49 C49 C49: LatestRevisionDate=17-Jul-2002, LatestRevisionNote="Re-released for DXP Platform.", PackageDescription="Radial Cap, Thru-Hole; 2 Leads; 0.3 in Pin Spacing", PackageReference=RAD-0.3, Published=8-Jun-2000, Publisher="Altium Limited"
D3: Code_JEDEC=DO-214-AB, LatestRevisionDate=17-Jul-2002, LatestRevisionNote="Re-released for DXP Platform.", PackageDescription="DO-214-AB/SMC; 2 C-Bend Leads; Body 7.9 x 5.9 mm, inc. leads (LxW)", PackageReference=SMC, PackageVersion=Sep-1996, Published=8-Jun-2000, Publisher="Altium Limited"

## Free pads (board coordinates)
  rect 2x2 hole 1.2: 1(28.421,79.197) 1(30.961,79.197) 1(94.34,94.645)
  round 2 hole 1.2: 1(94.34,92.105) 2(28.421,76.697) 2(30.961,76.697) 2(91.84,92.105) 2(91.84,94.645) 3(28.421,74.197) 3(30.961,74.197) 3(89.34,92.105) 3(89.34,94.645)

## Via types
v1: diameter 0.457, hole 0.305, Top Layer to Bottom Layer, tented both sides, 160 vias
v2: diameter 0.45, hole 0.2, Top Layer to Bottom Layer, tented both sides, 142 vias
v3: diameter 0.276, hole 0.2, Top Layer to Bottom Layer, tented both sides, 120 vias
v4: diameter 0.457, hole 0.3, Top Layer to Bottom Layer, tented both sides, 84 vias
v5: diameter 0.45, hole 0.203, Top Layer to Bottom Layer, tented both sides, 4 vias
v6: diameter 3.5, hole 3, Top Layer to Bottom Layer, 4 vias
v7: diameter 1.6, hole 0.8, Top Layer to Bottom Layer, tented both sides, 3 vias
v8: diameter 1.016, hole 0.711, Top Layer to Bottom Layer, tented both sides, 2 vias
v9: diameter 1.981, hole 1.27, Top Layer to Bottom Layer, tented both sides, 1 vias

## Nets (pads, with @x,y where several pads share a name; then routed paths per layer and width w, separated by ;. In a path a pad name is that pad's centre, name@x,y a point inside that pad or via, vN(x,y) a via of type N, cw(c..) or ccw(c..) an arc to the next point about the centre after c; other vN are vias at no path point)
3V3: 3V3.1 3V3.2 3V3.3 BOOT0.1 C1.2 C2.2 C7.2 C8.2 C9.2 C10.2 C11.2 C12.2 C13.2 C14.2 C15.2 C16.2 C17.2 C33.2 C34.2 C38.2 C39.2 C42.2 R2.1 R6.1 R11.1 R14.1 R15.1 R24.2 R25.2 U1.2 U3.1 U3.13 U3.17 U3.19 U3.32 U3.33 U3.64 U7.2 U8.8 U8.13 U9.3 U9.6 U10.3 U10.6 U11.3 X1.1 X1.4 | length 112.6
  Top Layer w0.1: C1.2@31.7,96.5 C2.2@32.525,96.5 32.87,96.155 U1.2@34.625,96.155 ; C10.2@66.65,74.75 68.071,74.75 U3.64@68.087,74.766 ; v2(69.403,67.053) 69.4,67.05 69.775,66.675 U8.13@70.195,66.675 ; U3.1@69.941,72.912 69.941,74.291 v2(70.125,74.475) ; C17.2@73.75,67.6 73.95,67.6 v2(74.025,67.675) ; v2(74.954,68.553) 75.222,68.553 C9.2@75.25,68.525 ; U3.33@77.459,84.138 77.459,83.291 v2(77.475,83.275) ; v2(78.375,75.775) 78.382,75.782 U3.19@79.313,75.782 ; v2@78.425,82.275 v2@78.429,82.279 ; v2(78.429,82.304) v2@78.429,82.279 ; v2(78.516,74.782) 78.509,74.775 79.304,74.775 U3.17@79.313,74.766 ; U3.32@79.313,82.284 78.434,82.284 v2@78.429,82.279
  Top Layer w0.25: v2(83.275,84.875) 83.325,84.825 83.6,85.1 R11.1@84.525,85.1
  Top Layer w0.3: C13.2@75.875,71.525 75.95,71.6 75.95,72.901 U3.13@75.961,72.912
  Top Layer w0.5: v2(50.225,66.025) 55.5,66.025 R2.1@55.675,65.85 55.675,65 56.5,64.175 60.85,64.175 61.7,65.025 61.7,66.875 R25.2@61.65,66.925 R24.2@61.65,69.05
  Top Layer w0.889: v7(91.525,84.275) 91.55,84.3 96.5,84.3 101.375,79.425 v7(101.375,65.825) ; v7(111.8,52.475) 114.45,49.825 U7.2@116.37,49.825 116.57,49.625 3V3.2@122.95,49.625 ; 3V3.3@122.95,47.125 3V3.2@122.95,49.625 ; 3V3.1@122.95,52.125 3V3.2@122.95,49.625
  Bottom Layer w0.1: v2(69.403,67.053) 69.447,67.053 v2@69.45,67.05 ; C39.2@69.45,66.7 v2@69.45,67.05 ; C38.2@69.45,67.425 v2@69.45,67.05 ; C16.2@69.45,74.775 C12.2@70.2,74.775 70.125,74.7 v2(70.125,74.475) ; v2(74.025,67.675) 74.15,67.8 X1.1@74.15,68.5 ; X1.4@74.15,70.25 X1.1@74.15,68.5 ; v2(74.954,68.553) 74.954,68.504 74.95,68.5 X1.1@74.15,68.5 ; C11.2@77.3,82.225 78.075,82.225 C7.2@78.125,82.275 ; C8.2@77.45,83 77.475,83.025 v2(77.475,83.275) ; 78.125,75.775 v2(78.375,75.775) ; C7.2@78.125,82.275 78.4,82.275 v2(78.429,82.304) ; C14.2@78.175,74.825 78.225,74.775 78.509,74.775 v2(78.516,74.782) ; U11.3@81.45,90.45 81.45,89.4 C42.2@81.825,89.025
  Bottom Layer w0.25: v2@83.2,84.875 v2(83.275,84.875) 88.15,84.875 88.75,84.275 v7(91.525,84.275)
  Bottom Layer w0.5: R6.1@46.875,66 50.2,66 v2(50.225,66.025)
  Bottom Layer w0.889: v7(101.375,65.825) 101.375,64.725 109.2,56.9 109.2,55.075 v7(111.8,52.475)
5V: 5V.1 5V.2 5V.3 "Video Switch.2" C31.1 C32.1 C35.2 C36.2 CN13.1 D1.K D2.K D5.A D6.A I2C.1 L2.2 LED1.4 LED2.4 LS1.A R17.2 R20.2 R21.2 U4.5 U7.3 U9.4 U10.4 U12_BL.11 U12_BR.11 U12_FL.11 U12_FR.11 | length 299.4
  Top Layer w0.2: v2(70.85,98.3) 70.85,96.275 71.025,96.1 71.975,96.1 72.125,96.25 ; 106.5,54.45 106.475,54.425 106.475,49 111.35,44.125 U12_FR.11@111.35,43.375
  Top Layer w0.25: D1.K@60.925,96.575 66.775,96.575 v2(68.55,98.35) v2@68.575,98.375 ; U4.5@72.125,96.715 72.125,96.25 72.325,96.05 73.925,96.05 v2(74.9,95.075) ; v2(78.6,95.075) 85,95.075 v2(86.65,96.725) ; v2(102.225,97.025) 103.075,97.875 I2C.1@103.075,100.025 ; v2(104.175,94.45) 104.325,94.6 R20.2@106.104,94.6 108.45,94.6 R21.2@108.5,94.65 110.15,94.65 v2(111.075,95.575) ; CN13.1@112.625,100.025 112.625,99.375 v2(114.15,97.85) 115.875,97.85 117.05,96.675 117.05,94.025 117.825,93.25 121.75,93.25 121.825,93.325 123.275,93.325 124.55,92.05 124.55,82.85 ; LED2.4@122.55,76.375 122.65,76.275 123.85,76.275 124.55,76.975 ; LED1.4@122.575,82.175 122.675,82.075 123.775,82.075 124.55,82.85 ; 5V.2@122.75,69.775 124.55,71.575 124.55,76.975 ; 124.55,76.975 124.55,82.85
  Top Layer w0.3: v2(54.503,44.477) 54.503,44.503 54.558,44.558 54.75,44.365 U12_BL.11@54.75,43.425 ; v2(85,58.425) 85,60.05 85.025,60.075 ; v2(91.35,43.625) 91.875,44.15 92.725,44.15 92.825,44.05 U12_BR.11@92.825,43.15
  Top Layer w0.4: U12_FL.11@36.925,43.3 v2(36.925,44.725) ; v2(49.875,43.325) 49.875,45.075 v2(51.75,46.95) ; v2(53.175,49.975) 55.65,52.45 55.65,61.3 57.95,63.6 63.25,63.6 66.55,60.3
  Top Layer w0.889: L2.2@105.15,49.75 L2.2@105.275,49.625 ; 113.15,54.45 115.485,52.115 U7.3@116.37,52.115 ; 5V.1@122.75,72.175 5V.1@122.75,72.275
  Top Layer w1.2: 90.35,60.075 90.567,60.075 90.578,60.086 95.622,60.086 95.633,60.075 98.175,60.075
  Top Layer w1.397: 98.175,60.075 107.75,60.075 108.975,58.85 C32.1@110.875,56.95 ; L2.2@105.15,49.75 R17.2@105.15,54.45 106.5,54.45 113.15,54.45 117.275,54.45 122.75,59.925 5V.3@122.75,67.275 5V.2@122.75,69.775 5V.1@122.75,72.175
  Top Layer w1.4: 66.55,60.3 66.575,60.275 79.2,60.275 ; LS1.A@79.2,63 79.2,60.275 ; 90.35,60.075 85.025,60.075 79,60.075 79.2,60.275
  Bottom Layer w0.089: D2.K@70.625,99.575 D2.K@70.85,99.35
  Bottom Layer w0.2: v2(70.85,98.3) D2.K@70.85,99.35
  Bottom Layer w0.25: v2(68.55,98.35) 70.8,98.35 v2(70.85,98.3) ; v2(74.9,95.075) v2(78.6,95.075) ; v2(86.65,96.725) 95.225,96.725 96.95,95 96.95,94.225 98.55,92.625 99.775,92.625 D6.A@101.55,94.4 ; v2(102.225,97.025) 101.55,96.35 D6.A@101.55,94.4 ; v2(104.175,94.45) 104.125,94.4 D6.A@101.55,94.4 ; v2(111.075,95.575) 111.075,96.4 112.525,97.85 v2(114.15,97.85) ; D5.A@117.4,90.7 120.025,93.325 121.825,93.325
  Bottom Layer w0.3: v2(51.75,46.95) 54.155,44.545 v2@54.57,44.545 ; v2(54.503,44.477) v2@54.57,44.545 ; v2(85,58.425) 85,49.975 v2(91.35,43.625)
  Bottom Layer w0.4: v2(36.925,44.725) 41.75,44.725 43.15,43.325 49.85,43.325 49.875,43.3 v2(49.875,43.325) ; v2(51.75,46.95) 51.75,48.55 v2(53.175,49.975)
8V4: 8V4.1 8V4.2 8V4.3 C28.2 C29.1 C30.1 L1.2 pad.2@28.421,76.697 pad.2@30.961,76.697 R18.2 | length 54.7
  Top Layer w1.27: L1.2@44.25,55.925 44.4,56.075 45.55,56.075 53.65,47.975 60.5,47.975 62.775,45.7 R18.2@66.05,45.7
  Top Layer w1.54: 27.875,71.375 29.125,71.375 31.9,68.6 31.9,64.907 C30.1@34.85,61.957
  Top Layer w1.6: 26.225,73.025 27.875,71.375
  Top Layer w1.7: 26.225,73.025 26.225,75.5
  Top Layer w1.9: 26.225,75.5 pad.2@27.422,76.697
  Top Layer w2: pad.2@27.422,76.697 pad.2@28.421,76.697 pad.2@30.961,76.697
  Top Layer w2.286: C30.1@34.85,61.957 34.85,56.493 C29.1@34.875,56.468
12V: 12V.1 12V.2 12V.3 "3S INPUT.A" C22.2 C23.2 C24.1 C25.2 C26.2 C27.2 C37.1 C44.2 C46.2 C47.2 C48.2 C49.2 R22.2 U5.5 U6.1 U12_BL.13 U12_BL.20 U12_BR.13 U12_BR.20 U12_FL.13 U12_FL.20 U12_FR.13 U12_FR.20 | length 81.4
  Top Layer w0.254: 58.85,36.325 C44.2@59.075,36.325 ; U5.5@73.17,51.475 73.245,51.55 C23.2@74.675,51.55
  Top Layer w0.305: C22.2@72.55,48.625 73.17,49.245
  Top Layer w0.381: 73.17,49.245 U5.5@73.17,51.475 ; C25.2@88.775,47.162 C25.2@89.625,47.162 ; C26.2@95.937,56.2 95.925,56.188 C27.2@95.925,54.05 96.37,53.605 U6.1@96.37,52.45
  Top Layer w1.143: 86.775,47.162 86.775,54.5 91.1,58.825 95.1,58.825 95.937,57.988 C26.2@95.937,56.2
  Top Layer w1.27: C24.1@82.575,44.807 84.931,47.162 86.775,47.162 C25.2@88.775,47.162
  Top Layer w1.778: v9(80.025,44.8) 80.032,44.807 C24.1@82.575,44.807
  Bottom Layer w1.397: 12V.1@27.275,69.175 12V.2@27.275,66.675 12V.3@27.275,64.175 29.85,61.6 29.85,33.65 31.425,32.075 v1(31.975,32.075)
  Bottom Layer w1.778: 77.8,44.7 77.9,44.8 v9(80.025,44.8)
  other v1: 60.875,30.8 61.775,30.8 62.475,30.8 63.425,30.85 52.125,30.875 64.25,30.875 32.5,30.9 33.725,30.9 50.7,30.925 31.4,30.95 43.2,31 49.475,31 44.1,31.05 45.125,31.05 46.075,31.05 100.1,31.075 100.875,31.075 98.65,31.1 99.4,31.1 117.475,31.1 118.325,31.1 119.1,31.1 119.875,31.1 120.625,31.1 121.375,31.1 89.85,31.15 88.525,31.175 89.15,31.175 87.9,31.2 87.2,31.225 106.65,31.225 107.325,31.225 108,31.25 108.675,31.25 33.125,31.275 51.425,31.275 60.45,31.3 31.975,31.325 50.075,31.325 61.35,31.325 62.1,31.325 62.825,31.325 42.825,31.6 43.625,31.6 44.525,31.6 50.725,31.625 33.725,31.675 52.125,31.675 31.4,31.7 32.525,31.7 49.475,31.7 120.275,31.725 117.875,31.75 118.675,31.75 119.5,31.75 120.975,31.75 99.05,31.775 99.725,31.775 100.45,31.775 117.1,31.775 101.275,31.825 106.3,31.85 106.975,31.875 86.825,31.9 87.55,31.9 88.2,31.9 88.85,31.9 89.475,31.9 90.15,31.9 107.6,31.9 108.325,31.9 60.85,31.925 62.5,31.925 61.75,31.95 51.45,32 50.1,32.025 33.15,32.05 34.25,32.1 44.5,32.35 50.725,32.35 41.975,32.375 42.825,32.375 43.65,32.375 49.5,32.375 52.125,32.375 100.85,32.375 98.675,32.4 99.4,32.4 100.1,32.4 121.35,32.4 117.475,32.425 118.3,32.425 119.1,32.425 119.85,32.425 120.6,32.425 32.55,32.45 33.725,32.475 60.425,32.475 61.325,32.475 62.1,32.475 62.85,32.475 108.675,32.5 106.65,32.525 107.325,32.525 108,32.525 87.9,32.575 88.525,32.575 89.175,32.575 89.85,32.575 87.175,32.6 90.5,32.6 50.1,32.75 51.45,32.75 52.8,32.75 33.125,32.775 31.95,32.8 72.975,32.8 34.275,32.85 52.15,33.05 50.725,33.075 49.5,33.1 53.35,33.1 61,33.125 61.725,33.125 62.5,33.125 98.55,33.125 99.175,33.125 99.825,33.125 100.45,33.125 101.1,33.125 106.3,33.125 106.975,33.125 117.125,33.125 117.875,33.125 118.625,33.125 33.7,33.15 60.275,33.15 97.925,33.15 107.625,33.15 32.55,33.175 34.925,33.175 41.975,33.175 42.85,33.175 108.275,33.175 108.95,33.175 43.675,33.2 44.55,33.2 59.475,33.2 86.825,33.2 87.525,33.2 88.2,33.2 88.85,33.2 89.5,33.2 90.15,33.2 90.825,33.2 109.6,33.2 41.075,33.225 72.125,33.275 73.775,33.275
  other v3: 76.694,26.976 77.329,27.205 75.957,27.23 77.811,27.636 75.475,27.789 78.015,28.449 75.398,28.525 77.862,29.211 75.602,29.237 76.084,29.694 77.405,29.694 76.719,29.922
BOOT0: BOOT0.4 C18.1 U3.60 | length 34.2
  Top Layer w0.1: U3.60@68.087,76.772 v2@69.2,76.772 ; v2(69.2,76.9) 69.328,76.772 70.216,76.772 73.075,79.631 v2(73.075,80.675) ; v2(73.05,86.425) 74,87.375 74,92.9 74.575,93.475 75.925,93.475 77.25,94.8 77.25,101.775 BOOT0.4@79.275,103.8
  Bottom Layer w0.1: v2(69.2,76.9) 69.225,76.925 C18.1@69.6,76.925 ; v2(73.05,86.425) 73.05,80.7 v2(73.075,80.675)
DRV_nEN: U3.20 U12_BL.9 U12_BR.9 U12_FL.9 U12_FR.9 | length 180
  Top Layer w0.089: U12_FL.9@38.225,43.3 38.225,46.75 39.625,48.15 v2(41,48.15) 52.236,48.15 56.05,44.336 U12_BL.9@56.05,43.425 ; v2(72.125,76.25) 79.278,76.25 79.303,76.275 U3.20@79.313,76.264 79.353,76.225 81.275,76.225 81.525,75.975 81.525,74.3 82.15,73.675 v2(86.675,73.675) 86.725,73.625 90,73.625 v2(90.025,73.65) ; v2(91.325,45.125) 91.525,44.925 93.4,44.925 94.125,44.2 U12_BR.9@94.125,43.15 ; v2(111.025,45.875) 112.65,44.25 U12_FR.9@112.65,43.375
  Bottom Layer w0.089: v2(41,48.15) 48.15,48.15 52.253,52.253 52.253,67.276 61.08,76.104 71.979,76.104 v2(72.125,76.25) ; v2(86.675,73.675) 86.651,73.651 86.651,70.051 89.328,67.374 89.328,47.122 v2(91.325,45.125) ; v2(90.025,73.65) 90.075,73.65 91.374,72.351 91.374,48.935 93.182,47.128 109.449,47.128 110.702,45.875 v2(111.025,45.875)
ESP_BOOT: BOOT.2 C6.2 Q2.2 U1.25 | length 34.7
  Top Layer w0.1: BOOT.2@47.625,71.625 47.625,73.825 52.625,78.825 U1.25@52.625,80.915 52.315,81.225 v2(50.8,81.225) ; v2(50.8,83.3) 50.8,88.75 51.266,89.216 58.966,89.216 59.675,89.925 59.675,91.725 59.475,91.925 58.175,91.925 Q2.2@57.4,92.7
  Bottom Layer w0.1: v2(50.8,81.225) v2(50.8,83.3)
ESP_EN: C5.2 EN.2 Q1.3 U1.3 | length 73.7
  Top Layer w0.1: U1.3@34.625,94.885 34.685,94.825 36.6,94.825 ; EN.2@49.35,67.925 51.15,67.925 52.075,68.85 52.075,76.55 53.75,78.225 53.75,81.287 53.441,81.596 51.717,81.596 51.686,81.627 42.923,81.627 38.65,85.9 38.65,92.775 36.6,94.825 ; Q1.3@63.29,94.503 61.678,94.503 60.725,93.55 56.125,93.55 55.6,94.075 55.6,94.925 55.05,95.475 37.25,95.475 36.6,94.825
ESP_IN_INTERRUPT: R5.2 U3.50 | length 11
  Top Layer w0.1: U3.50@68.087,81.776 68.135,81.825 v2(69.925,81.825)
  Bottom Layer w0.1: R5.2@64.4,87.775 66.025,87.775 69.925,83.875 v2(69.925,81.825)
ESP_OUT_INTERRUPT: R8.2 U3.53 | length 10.4
  Top Layer w0.1: U3.53@68.087,80.278 68.114,80.25 v2(69.4,80.25)
  Bottom Layer w0.1: R8.2@64.45,85.7 67.175,85.7 69.4,83.475 v2(69.4,80.25)
ESP_RX: CN3.1 U1.28 U3.52 | length 17.1
  Top Layer w0.25: U1.28@52.625,84.725 54.175,84.725 CN3.1@57.65,81.25 59.3,81.25 59.775,80.775 68.076,80.775 U3.52@68.087,80.786
ESP_RX0: U1.34 U2.26 | length 9.1
  Top Layer w0.1: U1.34@52.625,92.345 51.805,92.345 51.1,93.05 51.1,93.8 51.596,94.296 55.144,94.296 v2(55.153,94.305)
  Bottom Layer w0.1: v2(55.153,94.305) 55.1,94.252 55.177,94.175 U2.26@57.26,94.175
ESP_TX: CN3.2 U1.27 U3.51 | length 19.8
  Top Layer w0.25: U1.27@52.625,83.455 53.92,83.455 55.55,81.825 55.55,80.425 57.225,78.75 CN3.2@57.65,78.75 61.85,78.75 63.025,79.925 v2(63.575,79.925) ; v2(65.175,81.35) 68.005,81.35 U3.51@68.087,81.268
  Bottom Layer w0.25: v2(63.575,79.925) 63.575,80.75 64.175,81.35 v2(65.175,81.35)
ESP_TX0: U1.35 U2.25 | length 4.8
  Top Layer w0.1: U1.35@52.625,93.615 54.565,93.615 v2(54.775,93.825)
  Bottom Layer w0.1: v2(54.775,93.825) 54.925,93.675 U2.25@57.26,93.675
ESP_USB_N: ESP32.2 U2.5 | length 3.4
  Top Layer w0.127: v5(60.414,97.95) 60.316,98.048 60.316,98.652 60.45,98.787 ESP32.2@60.45,99.525
  Bottom Layer w0.127: U2.5@60.35,96.265 60.35,97.886 v5(60.414,97.95)
ESP_USB_P: ESP32.3 U2.4 | length 3.4
  Top Layer w0.127: ESP32.3@59.8,99.525 59.8,98.787 59.935,98.652 59.935,98.048 v5(59.836,97.95)
  Bottom Layer w0.127: v5(59.836,97.95) 59.85,97.936 U2.4@59.85,96.265
EX_I2C_SCL: CN13.2 I2C.2 R21.1 U3.42 | length 67.9
  Top Layer w0.1: U3.42@72.938,84.138 72.938,83.262 73.15,83.05 74.825,83.05 v2(74.9,82.975) ; v2(93.8,86.375) 108.05,86.375 113.825,92.15 113.825,94.482 R21.1@113.657,94.65 111.375,96.932 CN13.2@111.375,100.025 111.375,101.075 111.025,101.425 102.15,101.425 101.825,101.1 I2C.2@101.825,100.025
  Bottom Layer w0.1: v2(74.9,82.975) 74.9,82.95 75.114,82.736 77.633,82.736 78.677,83.78 78.677,84.492 78.559,84.61 78.559,85.434 79.525,86.4 93.775,86.4 v2(93.8,86.375)
EX_I2C_SDA: CN13.3 I2C.3 R20.1 U3.43 | length 52.9
  Top Layer w0.1: U3.43@72.455,84.138 72.45,84.133 72.45,83.175 73,82.625 v2(74.1,82.625) ; v2(91.775,85.7) 92.047,85.7 R20.1@100.947,94.6 ; I2C.3@100.575,100.025 100.575,94.972 R20.1@100.947,94.6 ; CN13.3@110.125,100.025 110.125,99.828 107.222,96.925 104.425,96.925 102.1,94.6 R20.1@100.947,94.6
  Bottom Layer w0.1: v2(74.1,82.625) 74.178,82.547 77.711,82.547 78.866,83.702 78.866,84.57 78.748,84.688 78.748,85.298 79.15,85.7 v2(91.775,85.7)